# Altium PCB SENSOR_PCB.PcbDoc
Units mm, origin at the board's own origin, x right, y up, seen from the top; angles counter-clockwise.
Board outline 50 x 50 mm, 2 copper layers (Top Layer, Bottom Layer); 20 components, 55 nets, 103 pads, 7 vias.
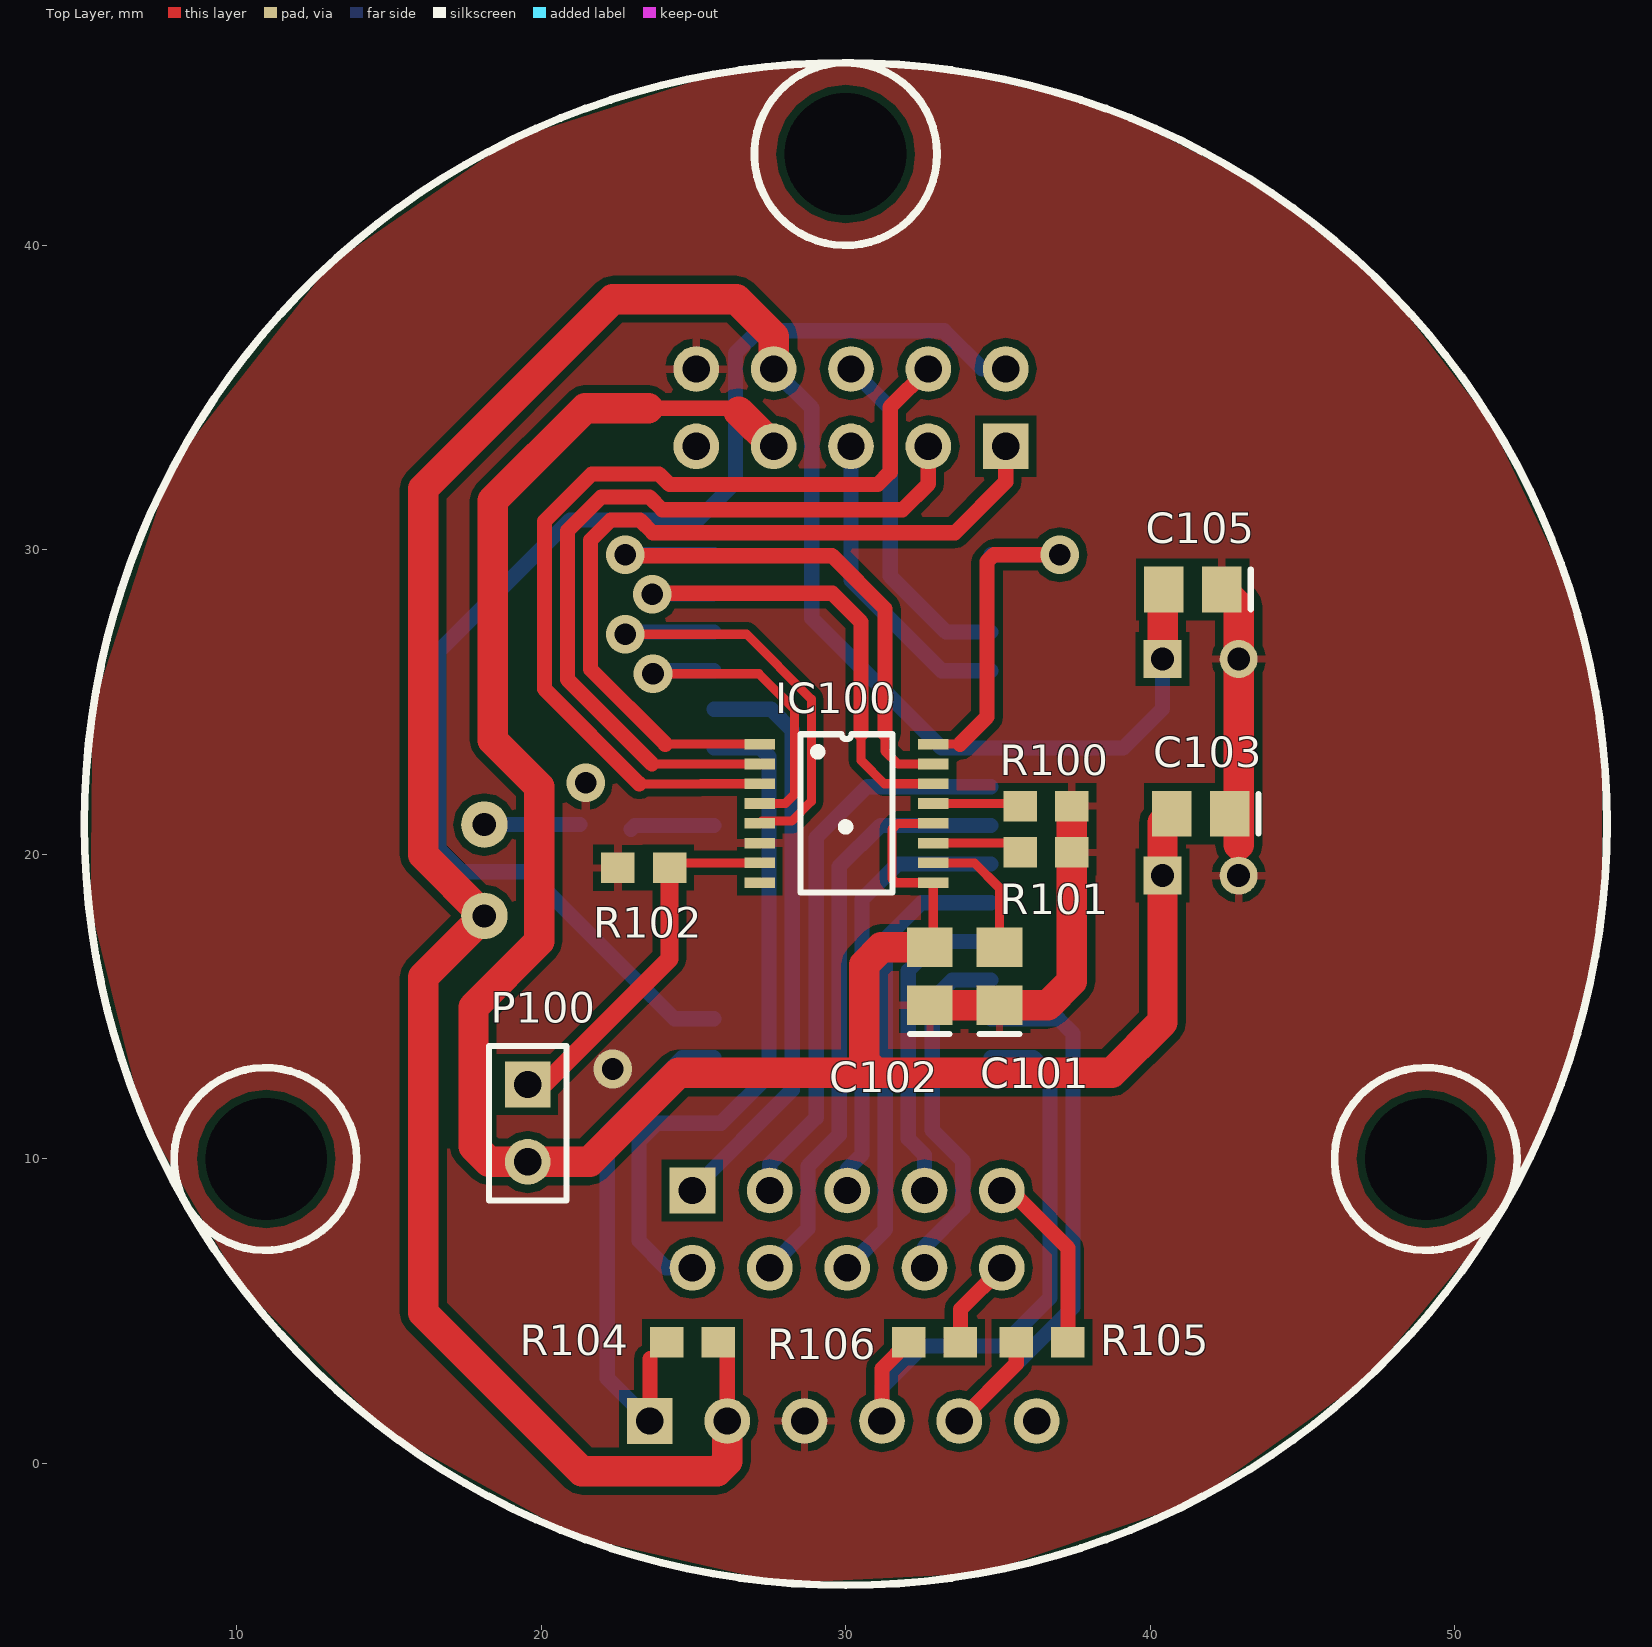
[diagram p0: Top Layer view]
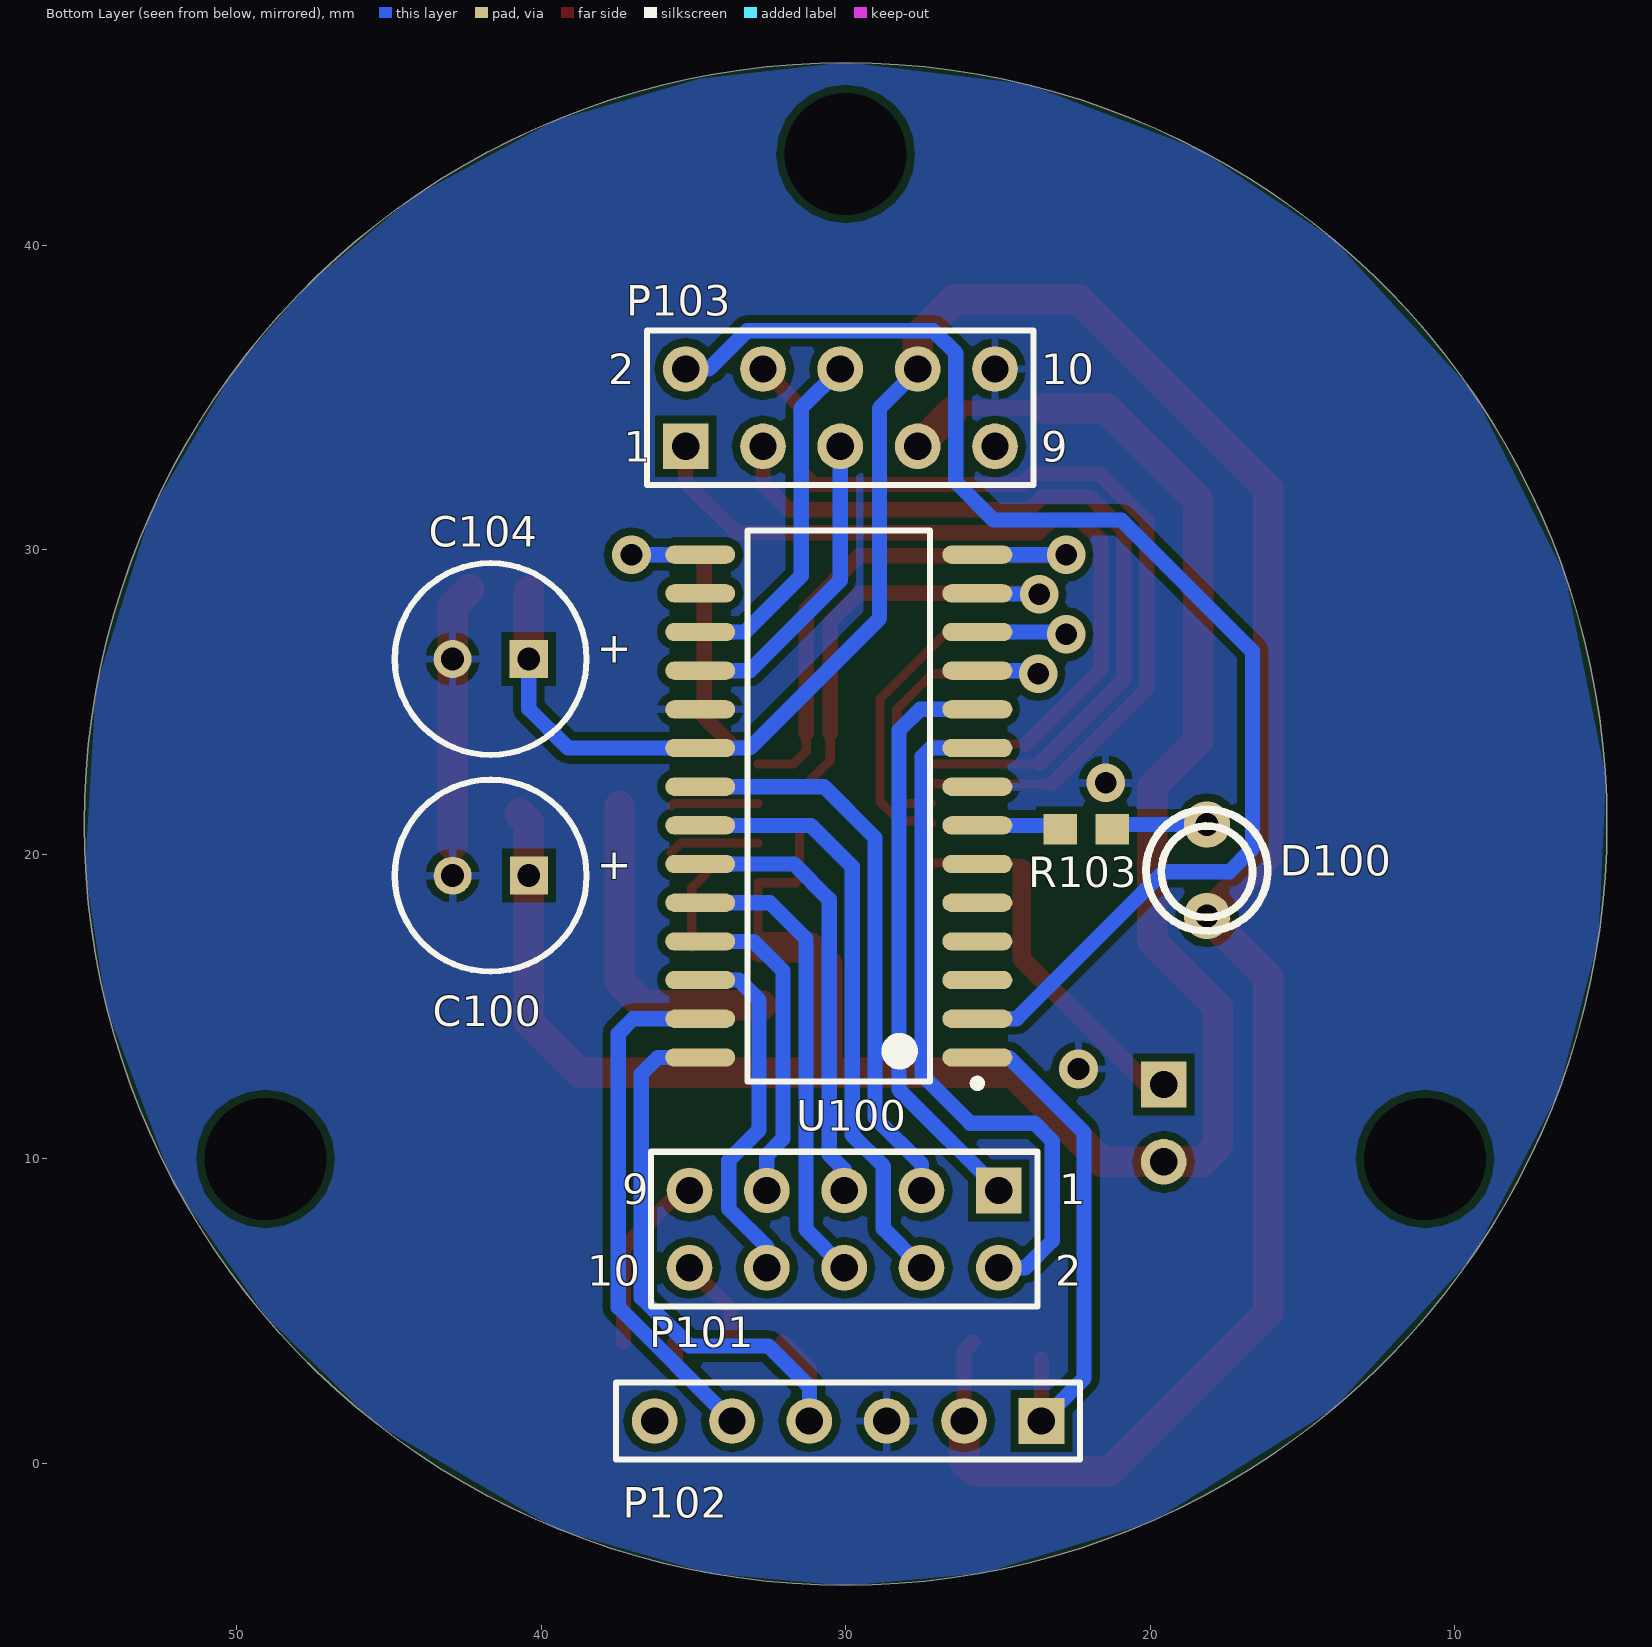
[diagram p1: Bottom Layer view, seen from below]

## Layer stack, top to bottom
Top Solder: solder mask 0.0102, Solder Resist, Dk 3.5
Top Layer: signal copper 0.0356
Dielectric1: dielectric 0.32, FR-4, Dk 4.8
Bottom Layer: signal copper 0.0356
Bottom Solder: solder mask 0.0102, Solder Resist, Dk 3.5

## Board outline
30,-4 cw(c30,21) 5,21 cw(c30,21) 30,46 cw(c30,21) 55,21 cw(c30,21)

## Design rules (kind name [scope] priority, off if disabled: settings)
Clearance [All] p1: gap=0.254 ignorepadtopadclearanceinfootprint=FALSE except(0: Arc-Hole Track-Hole SMDPad-Hole THPad-Hole Via-Hole Fill-Hole Poly-Hole Region-Hole Text-Hole)
PolygonConnect [All] p1: connectstyle=Relief reliefconductorwidth=0.254 reliefentries=4 polygonreliefangle="90 Angle" airgapwidth=0.254
RoutingVias [All] p1: holewidth=0.711 width=1.27 viastyle="Through Hole" minholewidth=0.711 minwidth=1.27 maxholewidth=0.711 maxwidth=1.27
SolderMaskExpansion [All] p1: expansion=0.102
Width [All] p1: maxlimit=2.54 minlimit=0.254 preferedwidth=0.6
30 further rules are at their usual default settings.

## Components (designator, comment, footprint, x,y, rotation, side; value= is the part's Value field where it differs from the comment)
C100 "10uF" C 41.655,19.304 r0 bottom
C101 "" 0805 35.052,16.002 r90 top
C102 "" 0805 32.766,16.002 r90 top
C103 "" 0805 41.656,21.336 r180 top
C104 "10uF" C 41.656,26.416 r0 bottom
C105 "" 0805 41.402,28.702 r180 top
D100 "STATUS" "LED 3mm" 18.136,19.482 r270 bottom
IC100 "AEAT-6600" TSSOP16 27.178,23.622 r0 top locked
P100 "ALIGN" HDR1X2 19.558,12.446 r270 top
P101 "Header 5X2" HDR2X5 24.968,8.966 r0 bottom locked
P102 "Header 6" HDR1X6 23.571,1.397 r0 bottom
P103 "Header 5X2" HDR2X5 35.255,33.401 r180 bottom locked
R100 "10K" ERA-0603 36.576,21.59 r180 top
R101 "10K" ERA-0603 36.576,20.066 r180 top
R102 "10K" ERA-0603 23.368,19.558 r0 top
R103 "330R" ERA-0603 22.098,20.828 r180 bottom
R104 "10K" ERA-0603 24.968,3.988 r0 top
R105 "10K" ERA-0603 36.449,3.988 r180 top
R106 "10K" ERA-0603 32.918,3.988 r180 top
U100 "PIC18F23K20-I/SO" SOIC-SO28_N 30.226,21.59 r0 bottom

## Footprints (in the part's own frame and the unit in brackets; to place one, negate y for a bottom-side part, rotate by r counter-clockwise, add the part's x,y. Pads: shape width x height; smd on the part's side, far side on the other; paste and mask are expansions set on the pad)
0805 [mm] "Chip Capacitor; Body 2.0 x 1.2 mm (LxW typ)"
  rect 1.3x1.5 smd: 1(-0.95,0) 2(0.95,0)
  silkscreen extent -1.9,-0.65 -1.9,0.65
C [mm] "Capacitor, Electrolytic, Radial; Body 6.3 x 6.8 mm (Dia.xH typ); Pin Spacing 2.5 mm (typ)"
  rect 1.25x1.25 hole 0.75: 1(-1.25,0)
  round 1.25 hole 0.75: 2(1.25,0)
  silkscreen extent -3.15,-3.15 3.15,3.15
ERA-0603 [mm] "Chip Resistor; Body 1.6 x 0.8 mm (LxW typ)"
  rect 1.1x1 smd: 1(-0.85,0) 2(0.85,0)
HDR1X2 [mm] "Connector; Header; 2 Position"
  rect 1.5x1.5 hole 0.9: 1(0,0)
  round 1.5 hole 0.9: 2(2.54,0)
  silkscreen extent -1.27,-1.27 3.81,1.27
HDR1X6 [mm] "Connector; Header; 6 Position"
  rect 1.5x1.5 hole 0.9: 1(0,0)
  round 1.5 hole 0.9: 2(2.54,0) 3(5.08,0) 4(7.62,0) 5(10.16,0) 6(12.7,0)
  silkscreen extent -1.27,-1.27 13.97,1.27
HDR2X5 [mm] "Connector; Header; 5x2 Position"
  rect 1.5x1.5 hole 0.9: 1(0,0)
  round 1.5 hole 0.9: 2(0,2.54) 3(2.54,0) 4(2.54,2.54) 5(5.08,0) 6(5.08,2.54) 7(7.62,0) 8(7.62,2.54) 9(10.16,0) 10(10.16,2.54)
  silkscreen extent -1.27,-1.27 11.43,3.81
"LED 3mm" [mil] "LED dioda 3 mm"
  round 60 hole 30: 1(-59.05,0) 2(59.06,0)
  silkscreen extent -79,-79 79,79
SOIC-SO28_N [mm] "SOIC, 28-Leads, Body 17.9x7.5mm, Pitch 1.27mm, IPC Medium Density"
  oval 2.3x0.6 smd: 1(-4.55,8.255) 2(-4.55,6.985) 3(-4.55,5.715) 4(-4.55,4.445) 5(-4.55,3.175) 6(-4.55,1.905) 7(-4.55,0.635) 8(-4.55,-0.635) 9(-4.55,-1.905) 10(-4.55,-3.175) 11(-4.55,-4.445) 12(-4.55,-5.715) 13(-4.55,-6.985) 14(-4.55,-8.255) 15(4.55,-8.255) 16(4.55,-6.985) 17(4.55,-5.715) 18(4.55,-4.445) 19(4.55,-3.175) 20(4.55,-1.905) 21(4.55,-0.635) 22(4.55,0.635) 23(4.55,1.905) 24(4.55,3.175) 25(4.55,4.445) 26(4.55,5.715) 27(4.55,6.985) 28(4.55,8.255)
  silkscreen extent -4.67,-9.05 3,9.23, body extent -3.8,-9.06 3.8,9.06, height 2.65
TSSOP16 [mm]
  rect 1x0.35 smd: 1(0,0) 2(0,-0.65) 3(0,-1.3) 4(0,-1.95) 5(0,-2.6) 6(0,-3.25) 7(0,-3.9) 8(0,-4.55) 9(5.7,-4.55) 10(5.7,-3.9) 11(5.7,-3.25) 12(5.7,-2.6) 13(5.7,-1.95) 14(5.7,-1.3) 15(5.7,-0.65) 16(5.7,0)
  silkscreen extent 1.34,-4.88 4.36,0.33, body extent 0.64,-4.83 5.08,0.25, height 1.2

## Part data
C100 C104: library part 94SC106X0016CBP, "Solid Aluminum Capacitor with Organic Semiconductor Electrolyte: 10uF, 16V, Bulk Pack"
C101 C102 C103 C105: library part C0805, "Ceramic Chip Capacitor - Standard"
D100: library part "LED 3mm yellow", "LED dioda 3 mm"
IC100: "Absolute encoder IC"
P100: library part "Header 2", "Header, 2-Pin"
P101 P103: "Header, 5-Pin, Dual row"
P102: "Header, 6-Pin"
R100 R101 R102 R103 R104 R105 R106: library part ERAV, "Metal Film Thermosensitive Chip Resistor, 0.56 Ohm to 10k Ohm Range, 5% Tolerance, 0603 Size, 0.063 W"
U100: "Flash Microcontroller with nanoWatt XLP Technology, 28-pin SOIC, Industrial Temperature"

## Free pads (board coordinates)
  round 1.524 hole 4: rupa(10.974,10) rupa(30,43) rupa(49.053,10)

## Via types
v1: diameter 1.27, hole 0.711, Top Layer to Bottom Layer, 7 vias

## Nets (pads, with @x,y where several pads share a name; then routed paths per layer and width w, separated by ;. In a path a pad name is that pad's centre, name@x,y a point inside that pad or via, vN(x,y) a via of type N, cw(c..) or ccw(c..) an arc to the next point about the centre after c; other vN are vias at no path point)
+3V3: C104.1 C105.2 D100.2 P102.2 P103.8 R104.2 U100.20 | length 87.1
  Top Layer w0.5: R104.2 26.111,3.695 P102.2 ; C105.2@40.406,28.656 C105.2
  Top Layer w1: P102.2 26.111,0.076 25.781,-0.254 21.336,-0.254 16.129,4.953 16.129,15.975 D100.2 16.129,19.988 16.129,32.004 22.352,38.227 26.416,38.227 27.635,37.008 P103.8 ; C104.1 C105.2@40.406,28.656
  Bottom Layer w0.5: P103.8 27.635,35.909 28.889,34.655 28.889,27.753 33.147,23.495 U100.20 39.116,23.495 40.406,24.785 C104.1
+5V: C100.1 C102.2 C103.2 IC100.9 IC100.12 P100.2 P103.7 | length 78.2
  Top Layer w0.3: C102.2 32.878,17.064 IC100.9 31.652,19.072 31.521,19.202 31.521,20.828 31.715,21.022 IC100.12
  Top Layer w0.5: 23.511,34.655 26.381,34.655 26.492,34.544
  Top Layer w1: 23.511,34.655 21.447,34.655 18.415,31.623 18.415,23.749 19.939,22.225 19.939,17.145 17.78,14.986 17.78,10.414 18.288,9.906 P100.2 21.59,9.906 24.511,12.827 30.988,12.827 ; 26.492,34.544 P103.7 ; C102.2 31.176,16.952 30.607,16.383 30.607,13.208 30.988,12.827 ; C103.2 40.405,21.035 C100.1 40.405,14.497 38.735,12.827 30.988,12.827
+24V: P103.9
A: IC100.1 P103.1 | length 26.8
  Top Layer w0.3: 24.079,23.622 IC100.1
  Top Layer w0.5: 24.079,23.622 21.619,26.082 21.619,30.317 22.287,30.984 23.245,30.984 23.665,30.564 33.587,30.564 35.255,32.233 P103.1
B: IC100.2 P103.3 | length 26.4
  Top Layer w0.3: 23.641,22.968 27.174,22.968 IC100.2
  Top Layer w0.5: 23.641,22.968 20.865,25.744 20.865,30.629 21.974,31.738 23.558,31.738 23.978,31.318 31.864,31.318 32.715,32.17 P103.3
ENC_1: P101.1 U100.10 | length 19.4
  Bottom Layer w0.5: P101.1@24.917,8.941 28.245,12.268 28.245,24.079 27.559,24.765 U100.10
ENC_2: P101.2 U100.9 | length 22.9
  Bottom Layer w0.5: P101.2 24.105,6.426 23.216,7.315 23.216,10.592 23.8,11.176 25.908,11.176 27.483,12.751 27.483,23.216 27.203,23.495 U100.9
ENC_4: P101.3 U100.21 | length 18.7
  Bottom Layer w0.5: P101.3 27.508,9.83 29.032,11.354 29.032,20.549 30.709,22.225 U100.21
ENC_8: P101.4 U100.22 | length 19.7
  Bottom Layer w0.5: P101.4 27.508,6.458 28.762,7.712 28.762,9.763 29.786,10.787 29.786,19.601 31.14,20.955 U100.22
ENC_10: P101.5 U100.23 | length 14.5
  Bottom Layer w0.5: P101.5 30.048,9.652 30.54,10.144 30.54,18.526 31.699,19.685 U100.23
ENC_20: P101.6 U100.24 | length 15.3
  Bottom Layer w0.5: P101.6 31.302,7.68 31.302,17.231 32.487,18.415 U100.24
ENC_40: P101.7 U100.25 | length 10.6
  Bottom Layer w0.5: P101.7 32.588,10.135 32.056,10.667 32.056,16.181 33.02,17.145 U100.25
ENC_80: P101.8 U100.26 | length 11.9
  Bottom Layer w0.5: P101.8 32.588,7.112 33.842,8.366 33.842,9.947 32.842,10.947 32.842,15.215 33.503,15.875 U100.26
ENC_100: P101.9 R105.1 | length 6
  Top Layer w0.5: P101.9 35.408,8.966 37.299,7.075 R105.1
ENC_200: P101.10 R106.1 | length 3
  Top Layer w0.5: R106.1 33.768,5.066 P101.10
ENC_OUT_1: 
ENC_OUT_2: 
ENC_OUT_4: 
ENC_OUT_8: 
ENC_OUT_10: 
ENC_OUT_20: 
ENC_OUT_40: 
ENC_OUT_80: 
ENC_OUT_100: 
ENC_OUT_200: 
ICSP_PGC: P102.5 R105.2 U100.27 | length 20.5
  Top Layer w0.5: P102.5 35.599,3.265 R105.2
  Bottom Layer w0.5: P102.5 37.465,5.131 37.465,14.122 36.982,14.605 U100.27
ICSP_PGD: P102.4 R106.2 U100.28 | length 20.3
  Top Layer w0.5: P102.4 31.191,3.111 R106.2
  Bottom Layer w0.5: P102.4 31.191,2.515 32.537,3.861 35.129,3.861 36.711,5.443 36.711,12.794 36.17,13.335 U100.28
ICSP_VPP: P102.1 R104.1 U100.1 | length 16.6
  Top Layer w0.5: P102.1 23.571,3.441
  Bottom Layer w0.5: P102.1 22.174,2.794 22.174,10.871 24.638,13.335 U100.1
MAG_HI: IC100.4 U100.11 | length 11.4
  Top Layer w0.3: v1(23.673,25.933) 27.153,25.933 28.321,24.765 28.321,21.971 28.022,21.672 IC100.4
  Bottom Layer w0.5: v1(23.673,25.933) 23.571,26.035 U100.11
MAG_LO: IC100.5 U100.12 | length 15.5
  Top Layer w0.3: v1(22.758,27.229) 26.746,27.229 28.875,25.1 28.875,21.742 28.226,21.093 27.249,21.093 IC100.5
  Bottom Layer w0.5: v1@22.53,27.305 U100.12
NetC101_2: C101.2 IC100.10 | length 4.5
  Top Layer w0.3: IC100.10 34.228,19.722 35.052,18.898 C101.2
NetD100_1: D100.1 R103.2 | length 3.1
  Bottom Layer w0.5: D100.1 18.137,20.98 R103.2@21.273,20.98
NetD200_2: 
NetIC100_7: IC100.7 P100.1 R102.2 | length 12.4
  Top Layer w0.3: R102.2 24.382,19.722 IC100.7
  Top Layer w0.6: P100.1 20.091,12.446 24.218,16.573 R102.2
NetIC100_11: IC100.11 R101.2 | length 3
  Top Layer w0.3: IC100.11 35.42,20.372 R101.2
NetIC100_13: IC100.13 R100.2 | length 2.9
  Top Layer w0.3: IC100.13 35.644,21.672 R100.2
NetQ200_1: 
NetQ201_1: 
NetQ206_1: 
NetQ207_1: 
NetQ212_1: 
NetQ213_1: 
NetQ218_1: 
NetQ219_1: 
NetQ224_1: 
NetQ225_1: 
NetR103_1: R103.1 U100.7 | length 2.8
  Bottom Layer w0.5: R103.1 23.075,20.955 U100.7
RS422_RX: P103.5 U100.18 | length 10.2
  Bottom Layer w0.5: P103.5 30.175,29.007 33.147,26.035 U100.18
RS422_TX: P103.6 U100.17 | length 11.4
  Bottom Layer w0.5: P103.6 31.461,34.655 31.461,29.143 33.299,27.305 U100.17
SSI_CLK: IC100.15 U100.14 | length 18.6
  Top Layer w0.3: 31.293,23.959 31.293,23.393 31.714,22.972 IC100.15
  Top Layer w0.5: v1(22.758,29.845) 22.793,29.81 29.55,29.81 31.293,28.067 31.293,23.959
  Bottom Layer w0.5: v1(22.758,29.845) U100.14
SSI_DATA: IC100.16 U100.15 | length 12
  Top Layer w0.3: IC100.16 33.757,23.622
  Top Layer w0.5: 33.757,23.622 34.646,24.511 34.646,29.616 34.874,29.845 v1(37.033,29.845)
  Bottom Layer w0.5: U100.15 v1(37.033,29.845)
SSI_NCS: IC100.14 U100.13 | length 16.3
  Top Layer w0.3: 30.505,23.952 30.505,23.089 31.272,22.322 IC100.14
  Top Layer w0.5: v1@23.8,28.575 29.566,28.575 30.505,27.635 30.505,23.952
  Bottom Layer w0.5: v1(23.647,28.55) U100.13@25.651,28.55
VSS: C100.2 C101.1 C102.1 C103.1 C104.2 C105.1 IC100.6 P102.3 P103.10 R100.1 R101.1 R102.1 U100.8 U100.19 | length 19.4
  Top Layer w1: C102.1 C101.1 36.642,15.052 37.426,15.836 R101.1 R100.1 ; C105.1 42.906,28.148 C104.2 42.906,20.321 42.905,20.32
  other v1: 22.352,12.954 21.463,22.352
Z: IC100.3 P103.4 | length 30.1
  Top Layer w0.3: 23.22,22.322 23.362,22.322 23.37,22.314 25.233,22.314 25.241,22.322 IC100.3
  Top Layer w0.5: 23.22,22.322 20.111,25.431 20.111,30.941 21.662,32.492 23.87,32.492 24.215,32.147 31.055,32.147 31.461,32.553 31.461,34.687 P103.4
ZERRO: P103.2 U100.2 | length 43.8
  Bottom Layer w0.5: U100.2 24.384,14.605 19.558,19.431 17.399,19.431 16.637,20.193 16.637,26.67 20.951,30.984 25.142,30.984 26.381,32.223 26.381,36.46 27.116,37.195 33.235,37.195 34.489,35.941 P103.2
pads on no net: IC100.8 P102.6 U100.3 U100.4 U100.5 U100.6 U100.16

## Polygon pours and split planes (outlines as drawn)
VSS on Top Layer "Bottom Layer-No Net" (solid, remove dead copper, pour order 10): 25.654,45.593 19.056,43.477 13.081,39.37 7.874,32.766 5.285,24.762 5.207,18.288 6.903,11.433 10.16,5.842 14.986,1.016 21.131,-2.386 27.94,-3.937 34.508,-3.602 41.402,-1.27 47.136,2.796 51.308,7.874 53.594,12.7 54.829,17.985 54.829,24.015 53.721,28.829 51.181,34.163 47.686,38.686 43.574,41.994 38.481,44.577 33.528,45.72 29.245,45.989 25.492,45.602
VSS on Bottom Layer "Bottom Layer-No Net" (solid, remove dead copper, pour order 12): 30,46.011 24.014,45.285 18.377,43.147 13.995,40.205 9.416,35.208 6.367,29.155 5.034,22.51 5.285,17.238 6.614,12.131 9.416,6.792 13.995,1.795 19.939,-1.905 25.492,-3.602 30,-4.011 34.508,-3.602 39.497,-2.159 45.425,1.311 49.022,4.826 52.07,9.144 54.285,15.014 54.966,19.49 54.602,25.508 52.808,31.265 50.136,35.817 47.686,38.686 44.208,41.584 39.567,44.097 34.798,45.466 30,46.011

## Silkscreen, mask and mechanical layers (free items; w line width, h text height)
Top Overlay:
  circle w0.254: c30,21 r25
  circle w0.254: c30,43 r3
  circle w0.254: c49.053,10 r3
  circle w0.254: c10.947,10 r3

## Text inside footprints (layer, text, board x,y; h text height)
C100: Bottom Overlay "+" at 37.03,20.054 h1 r180
C104: Bottom Overlay "+" at 37.031,27.166 h1 r180
P101: Bottom Overlay "10" at 38.481,5.842 h1; Bottom Overlay "9" at 37.338,8.509 h1; Bottom Overlay "1" at 22.987,8.509 h1; Bottom Overlay "2" at 23.114,5.842 h1
P103: Bottom Overlay "10" at 23.571,35.433 h1; Bottom Overlay "9" at 23.571,32.893 h1; Bottom Overlay "1" at 37.287,32.893 h1; Bottom Overlay "2" at 37.795,35.433 h1